# EAGLE board Bling Ring (EAGLE 6.4)
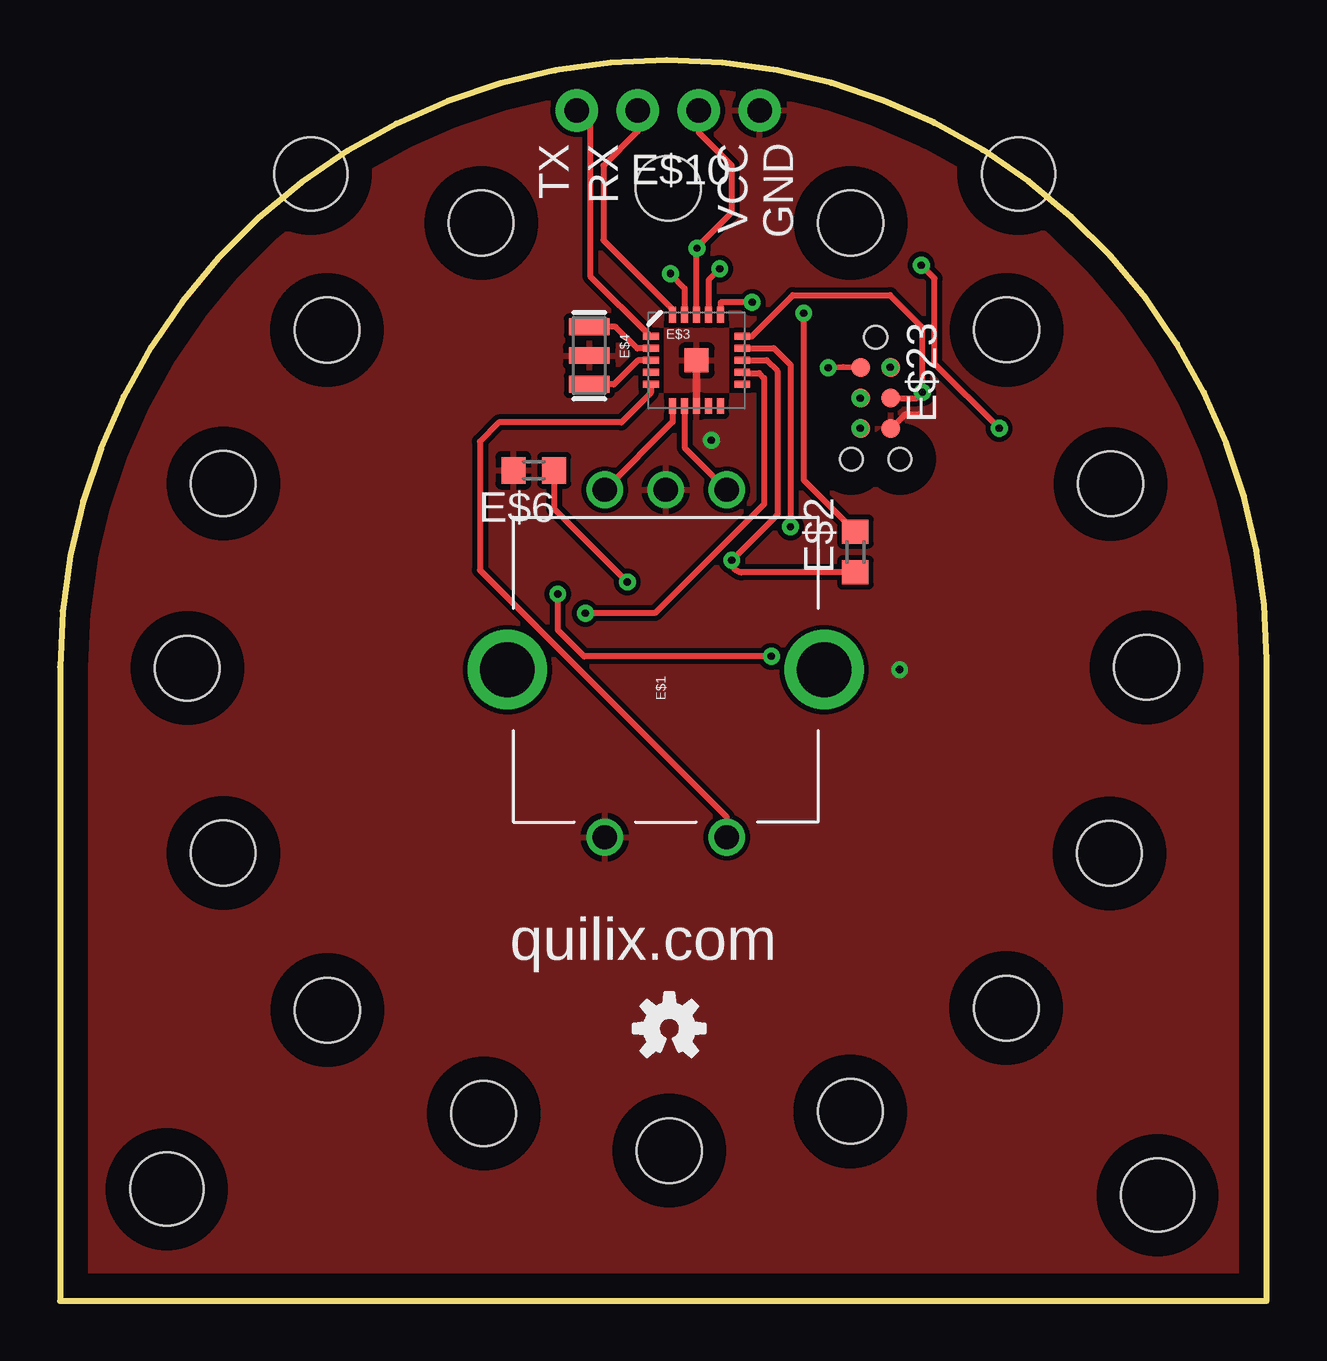
[diagram p0: board, top side]
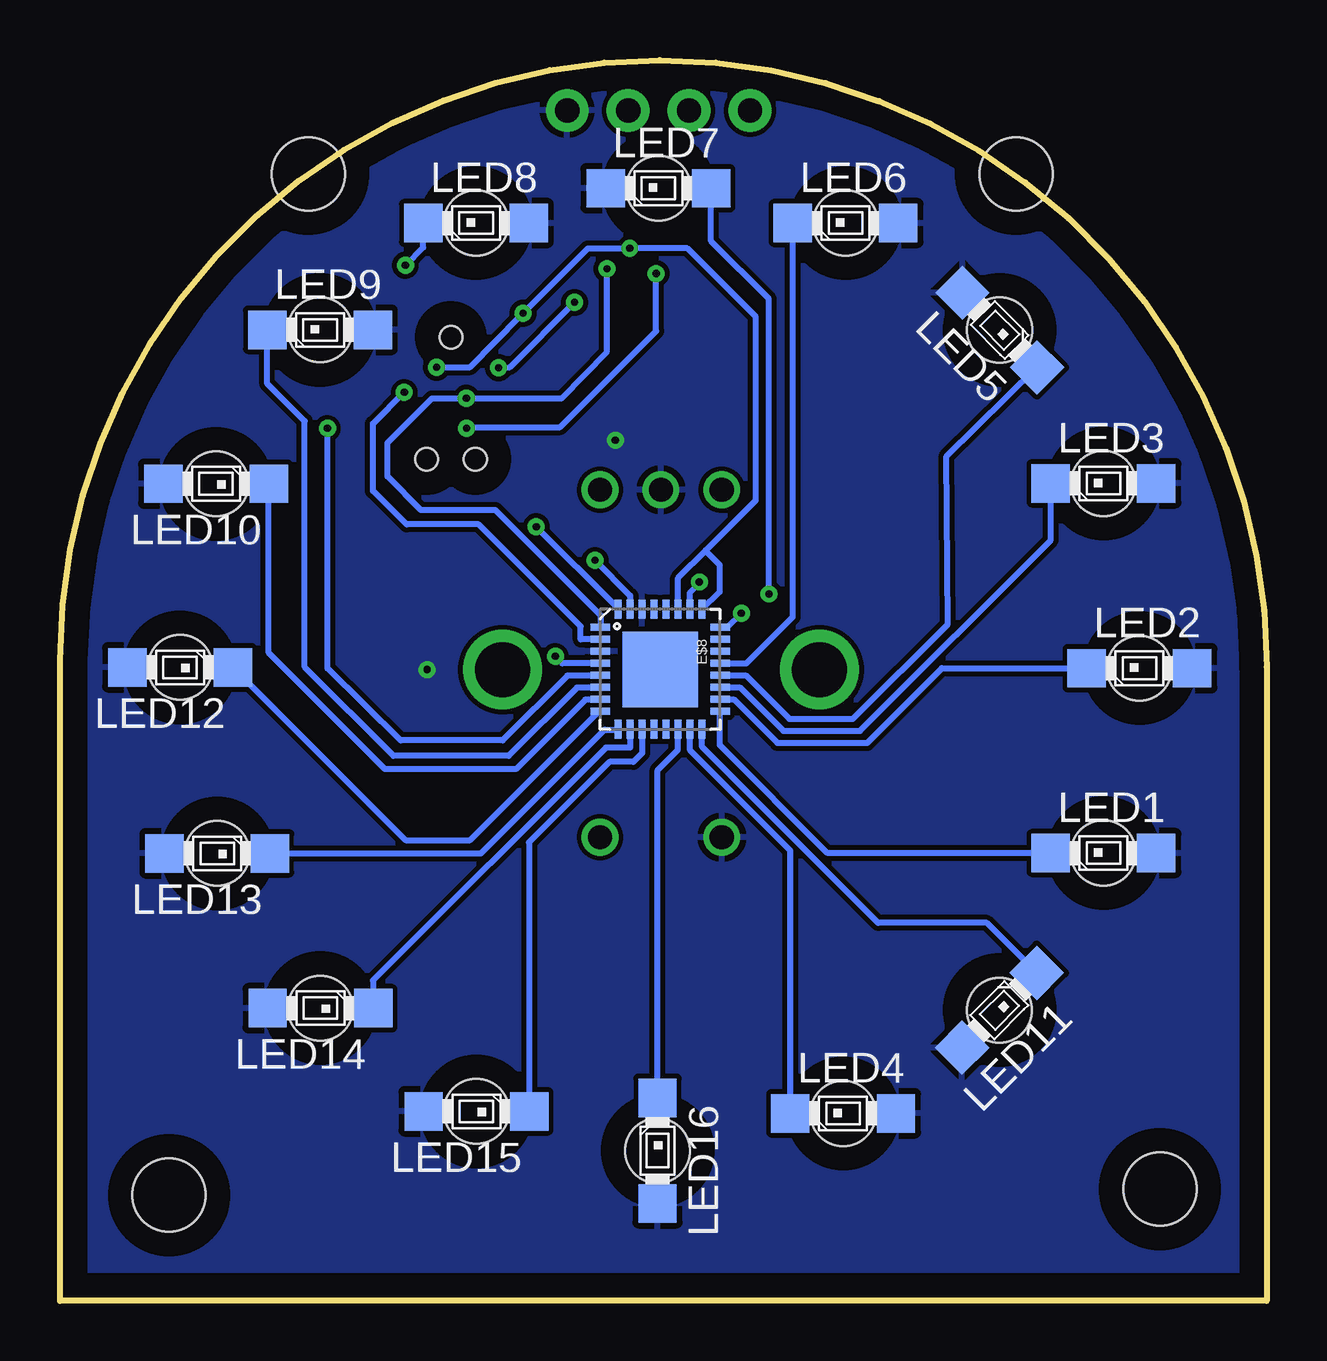
[diagram p1: board, bottom side, seen from below]

Size 50.3 x 51.7 mm. Coordinates in mm from the lower left corner, seen from the top.
Outline: 0,0 50.3,0 50.3,26.7 arc90 25.3,51.7 arc90 0,26.4 0,0
Copper layers (1*16): Top 0.035mm / dielectric 1.5mm / Bottom 0.035mm
Design rules "default": minimum track width 10mil, minimum drill 24mil, track to track 8mil, track to pad 8mil, pad to pad 8mil, via to via 8mil, smd to smd 8mil, copper to edge 40mil, drill to drill 8mil, minimum pad ring 10mil, minimum via ring 8mil, stop-mask expansion 4mil, vias tented up to drill 0mil, thermal gap 10mil

## Footprints (pad centres in the part's own frame; a part is rotated, then mirrored left to right if it is on the bottom)
ROTARY_ENC_PLAIN = drill 1.016: A 7.493,-2.54; B 7.493,2.54; C 7.493,0; SW+ -6.985,2.54; SW- -6.985,-2.54 | drill 2.286: P$3 0,6.604; P$4 0,-6.604
R0603 = smd 1 x 1.1: 1 -0.85,0; 2 0.85,0
QFN20 = smd 1 x 1: 0 0,0 | smd 0.65 x 0.3: 1 -1.9,1; 2 -1.9,0.5; 3 -1.9,0; 4 -1.9,-0.5; 5 -1.9,-1; 11 1.9,-1; 12 1.9,-0.5; 13 1.9,0; 14 1.9,0.5; 15 1.9,1 | smd 0.3 x 0.65: 6 -1,-1.9; 7 -0.5,-1.9; 8 0,-1.9; 9 0.5,-1.9; 10 1,-1.9; 16 1,1.9; 17 0.5,1.9; 18 0,1.9; 19 -0.5,1.9; 20 -1,1.9
RESONATOR-SMD = smd 0.7 x 1.7: 1 -1.2,0; 2 0,0; 3 1.2,0
STAND-OFF-TIGHT = hole 3.048: 0,0
QFN-32 = smd 0.285 x 0.8: 1 -1.75,-2.5; 2 -1.25,-2.5; 3 -0.75,-2.5; 4 -0.25,-2.5; 5 0.25,-2.5; 6 0.75,-2.5; 7 1.25,-2.5; 8 1.75,-2.5; 17 1.75,2.5; 18 1.25,2.5; 19 0.75,2.5; 20 0.25,2.5; 21 -0.25,2.5; 22 -0.75,2.5; 23 -1.25,2.5; 24 -1.75,2.5 | smd 0.8 x 0.285: 9 2.5,-1.75; 10 2.5,-1.25; 11 2.5,-0.75; 12 2.5,-0.25; 13 2.5,0.25; 14 2.5,0.75; 15 2.5,1.25; 16 2.5,1.75; 25 -2.5,1.75; 26 -2.5,1.25; 27 -2.5,0.75; 28 -2.5,0.25; 29 -2.5,-0.25; 30 -2.5,-0.75; 31 -2.5,-1.25; 32 -2.5,-1.75 | smd 3.15 x 3.15: EP 0,0
1X04-CLEANBIG = drill 1.016 pad 1.778: 1 -3.81,0; 2 -1.27,0; 3 1.27,0; 4 3.81,0
TC2030-MCP-NL = smd 0.787 x 0.787: 1 1.27,-0.635; 2 1.27,0.635; 3 2.54,-0.635; 4 2.54,0.635; 5 3.81,-0.635; 6 3.81,0.635 | hole 0.95: 0,0; 5.08,-1.016; 5.08,1.016
MINI-TOPLED-SANTANA = smd 1.6 x 1.6: A 0,2.2; C 0,-2.2 | hole 2.7: 0,0

## Placement (x,y rotation side)
E$1  [ROTARY_ENC_PLAIN]  25.25,26.3 90 top
E$2  [R0603]  33.15,31.2 90 top
E$3  [QFN20]  26.54,39.19 0 top
E$4  [RESONATOR-SMD]  22.06,39.39 270 top
E$5  [STAND-OFF-TIGHT]  45.75,4.4 0 top
E$6  [R0603]  19.75,34.6 180 top
E$7  [STAND-OFF-TIGHT]  4.45,4.65 0 top
E$8  [QFN-32]  25.28,26.31 270 bottom
E$9  [STAND-OFF-TIGHT]  10.45,46.95 0 top
E$10  [1X04-CLEANBIG]  25.35,49.6 180 top
E$13  [OSHW-LOGO-S]  25.4,11.35 0 top
E$15  [STAND-OFF-TIGHT]  39.95,46.95 0 top
E$23  [TC2030-MCP-NL]  34,40.15 270 top
LED1  [MINI-TOPLED-SANTANA]  6.81,18.66 270 bottom
LED2  [MINI-TOPLED-SANTANA]  5.31,26.36 270 bottom
LED3  [MINI-TOPLED-SANTANA]  6.81,34.06 270 bottom
LED4  [MINI-TOPLED-SANTANA]  17.66,7.81 270 bottom
LED5  [MINI-TOPLED-SANTANA]  11.13,40.45 45 bottom
LED6  [MINI-TOPLED-SANTANA]  17.56,44.91 270 bottom
LED7  [MINI-TOPLED-SANTANA]  25.36,46.36 270 bottom
LED8  [MINI-TOPLED-SANTANA]  32.96,44.91 270 bottom
LED9  [MINI-TOPLED-SANTANA]  39.46,40.46 270 bottom
LED10  [MINI-TOPLED-SANTANA]  43.79,34.04 90 bottom
LED11  [MINI-TOPLED-SANTANA]  11.14,12.11 135 bottom
LED12  [MINI-TOPLED-SANTANA]  45.29,26.39 90 bottom
LED13  [MINI-TOPLED-SANTANA]  43.74,18.64 90 bottom
LED14  [MINI-TOPLED-SANTANA]  39.44,12.19 90 bottom
LED15  [MINI-TOPLED-SANTANA]  32.94,7.89 90 bottom
LED16  [MINI-TOPLED-SANTANA]  25.39,6.26 180 bottom

## Library data of the parts
E$1 E$5 E$7 E$9 E$15 = SparkFun-Electromechanical
E$2 E$6 E$10 LED1-LED16 = adafruit
E$3 E$4 E$13 = SparkFun
E$8 = SparkFun-DigitalIC
E$23 = tag

## Nets
3.3V: E$2.2 E$3.18 E$8.25 E$8.27 E$10.2 E$23.2
GND: E$1.C E$1.SW+ E$3.0 E$3.8 E$4.2 E$6.2 E$8.3 E$8.30 E$10.1 E$23.6 LED1.A LED2.A LED3.A LED4.A LED5.A LED6.A LED7.C LED8.A LED9.A LED10.A LED11.A LED12.A LED13.A LED14.A LED15.A LED16.A
IREF: E$6.1 E$8.26
MOSI: E$3.15 E$8.2 E$23.4
RESET: E$3.19 E$23.5
S$1: E$3.12 E$8.24
S$3: E$2.1 E$3.13 E$8.31
S$4: E$3.20 E$10.3
S$5: E$8.17 LED1.C
S$6: E$8.21 LED6.C
S$7: E$3.1 E$10.4
S$8: E$3.2 E$4.1
S$9: E$8.20 LED5.C
S$10: E$3.14 E$8.32
S$12: E$3.3 E$4.3
S$14: E$8.18 LED2.C
S$15: E$8.16 LED11.C
S$16: E$8.15 LED4.C
S$17: E$8.14 LED16.C
S$18: E$8.11 LED15.C
S$19: E$8.10 LED14.C
S$20: E$8.9 LED13.C
S$23: E$8.8 LED12.C
S$24: E$8.7 LED10.C
S$25: E$8.6 LED9.C
S$26: E$8.5 LED8.C
S$27: E$8.4 LED7.A
S$28: E$8.19 LED3.C
S$29: E$3.16 E$23.1
S$30: E$1.A E$3.7
S$31: E$1.B E$3.6
S$32: E$1.SW- E$3.5
SCK: E$3.17 E$8.1 E$23.3

## Tracks (layer width: path | path; a pad name or v marks a point on that pad's centre or on a via)
3.3V  (via drill 0.3)
  Top 0.254: E$10.2 26.62,48.68 28,47.3 28,45.35 26.53,43.88 | E$3.18 26.53,43.88 | v26.55,43.85 26.53,43.88 | E$23.2 34.62,38.9 v34.6,38.9 | E$2.2 31,34.2 v31,41.15
  Bottom 0.254: E$8.27 24.53,30.12 23.38,31.27 | 23.38,31.27 21.3,33.35 21.3,41 24.15,43.85 v26.55,43.85 28.3,43.85 31.12,41.02 | E$8.25 22.8,29.54 22.8,30.65 23.38,31.23 23.38,31.27 | v34.6,38.9 33.2,38.9 31.12,41.02 | v31,41.15 31.12,41.02
GND  (via drill 0.3)
  Top 0.254: E$23.6 35.24,36.95 35.8,36.95
  Top 0.305: E$3.8 E$3.0
  other vias: 35,26.3 27.15,35.85
  pour Bottom: 1.2,0.5 1.25,26.5 arc-90 25.3,50.55 arc-91 49.2,26.35 49.1,0.55
  pour Top: 0.7,0.5 0.65,26.65 arc-90 25.05,51.05 25.55,51.05 arc-90 49.7,26.9 49.75,0.5
IREF  (via drill 0.3)
  Top 0.254: E$6.1 20.6,33 v23.65,29.95
  Bottom 0.254: E$8.26 24.03,29.52 v23.65,29.95
MOSI  (via drill 0.3)
  Top 0.254: E$3.15 28.84,40.18 30.55,41.9 34.6,41.9 35.95,40.55 v35.95,37.85 35.71,37.61 E$23.4
  Bottom 0.254: E$8.2 28.6,27.56 28.6,28.1 32.85,32.35 35.85,32.35 37.25,33.75 37.25,36.55 v35.95,37.85
RESET  (via drill 0.3)
  Top 0.254: E$23.5 33.3,36.4 v33.35,36.35 | v25.45,42.8 26.03,42.18 E$3.19
  Bottom 0.254: v33.35,36.35 33.3,36.4 29.45,36.4 25.45,40.4 v25.45,42.8
S$1  (via drill 0.3)
  Top 0.254: E$3.12 28.45,38.65 29.15,38.65 29.35,38.45 29.35,33.2 24.8,28.65 v21.9,28.65
  Bottom 0.254: v21.9,28.65 22.49,28.06 E$8.24
S$3  (via drill 0.3)
  Top 0.254: E$3.13 29.45,39.2 29.9,38.75 29.9,32.75 v28,30.85 arc90 28.4,30.35 E$2.1
  Bottom 0.254: v28,30.85 26.53,29.38 E$8.31
S$4
  Top 0.254: E$10.3 24.08,48.73 22.65,47.3 22.65,44.2 25.55,41.3 E$3.20
S$5
  Bottom 0.254: LED1.C 18.31,18.66 22.8,23.15 22.8,24.54 E$8.17
S$6
  Bottom 0.254: E$8.21 21.69,26.56 19.76,28.49 LED6.C
S$7
  Top 0.254: E$10.4 22.1,49.04 22.1,42.7 24.59,40.21 E$3.1
S$8
  Top 0.254: E$3.2 24.06,39.68 23.16,40.59 E$4.1
S$9
  Bottom 0.254: E$8.20 21.71,26.06 19.9,24.25 17.25,24.25 13.3,28.2 13.35,35.2 LED5.C
S$10  (via drill 0.3)
  Top 0.254: E$3.14 29.75,39.7 30.45,39 v30.45,32.25
  Bottom 0.254: E$8.32 27.13,28.93 v30.45,32.25
S$12
  Top 0.254: E$3.3 24.09,39.18 23.09,38.18 E$4.3
S$14
  Bottom 0.254: E$8.18 22.21,25.06 20.4,23.25 16.65,23.25 13.54,26.36 LED2.C
S$15
  Bottom 0.254: 23.55,23.79 E$8.16 23.53,23.08 16.2,15.75 11.67,15.75 LED11.C
S$16
  Bottom 0.254: LED4.C 19.86,18.76 24.03,22.93 E$8.15
S$17
  Bottom 0.254: LED16.C 25.39,22.11 24.55,22.95 24.55,23.79 E$8.14
S$18
  Bottom 0.254: E$8.11 26.03,22.82 26.4,22.45 27.4,22.45 30.75,19.1 LED15.C
S$19
  Bottom 0.254: E$8.10 26.53,23.05 27.55,23.05 37.25,13.35 LED14.C
S$20
  Bottom 0.254: LED13.C 32.76,18.64 27.6,23.8 E$8.9
S$23
  Bottom 0.254: LED12.C 35.9,19.2 33.2,19.2 27.84,24.56 E$8.8
S$24
  Bottom 0.254: E$8.7 28.4,25.05 31.3,22.15 36.75,22.15 41.59,26.99 LED10.C
S$25
  Bottom 0.254: E$8.6 28.75,25.55 31.6,22.7 36.4,22.7 40.1,26.4 40.1,36.65 41.66,38.21 LED9.C
S$26  (via drill 0.3)
  Top 0.254: v39.15,36.35 36.45,39.05 36.45,42.6 v35.9,43.15
  Bottom 0.254: E$8.5 29.15,26.05 31.85,23.35 36.1,23.35 39.15,26.35 v39.15,36.35 | v35.9,43.15 35.16,43.89 LED8.C
S$27  (via drill 0.3)
  Top 0.254: v29.65,26.85 21.85,26.85 20.75,27.95 v20.75,29.45
  Bottom 0.254: E$8.4 29.36,26.56 v29.65,26.85 | 23.12,46.4 LED7.A 23.16,44.16 20.75,41.75 v20.75,29.45
S$28
  Bottom 0.254: E$8.19 21.96,25.56 20.15,23.75 16.95,23.75 9,31.7 LED3.C
S$29  (via drill 0.3)
  Top 0.254: E$23.1 32.65,38.9 v32.02,38.88 | v28.85,41.6 27.53,41.6 E$3.16
  Bottom 0.254: v32.02,38.88 31.55,38.9 v28.85,41.6
S$30
  Top 0.254: E$3.7 26.03,35.55 E$1.A
S$31
  Top 0.254: E$3.6 25.53,36.62 E$1.B
S$32
  Top 0.254: E$3.5 24.63,37.84 23.4,36.6 18.3,36.6 17.5,35.8 17.5,30.45 27.79,20.16 E$1.SW-
SCK  (via drill 0.3)
  Top 0.254: v27.5,43 27.03,42.53 E$3.17 | E$23.3 33.45,37.6 v33.35,37.6 v33.36,37.61 E$23.3
  Bottom 0.254: v33.35,37.6 29.4,37.6 27.5,39.55 v27.5,43 | E$23.3 34.8,37.6 36.65,35.75 36.65,34.35 35.25,32.95 32.15,32.95 27.75,28.55 27.75,28.09 E$8.1
  other vias: 33.37,37.61

## Text on the board
_tsilk: TX | RX | VCC | GND | quilix.com